# Altium PCB BIT_Level_Shift.PcbDoc
Units mil, origin at the board's own origin, x right, y up, seen from the top; angles counter-clockwise.
Board outline 1435 x 615 mil, 2 copper layers (Top Layer, Bottom Layer); 16 components, 11 nets, 39 pads, 0 vias.
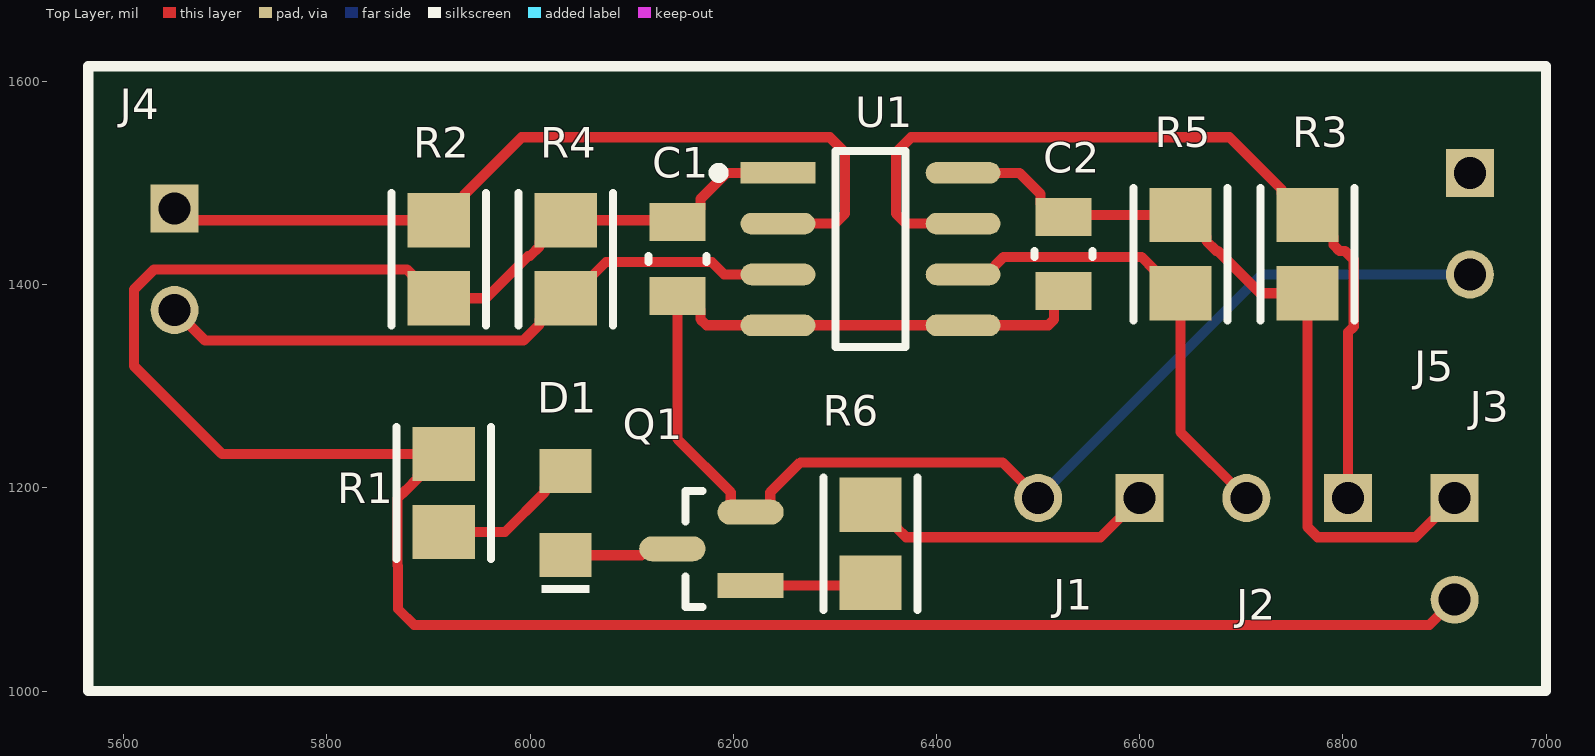
[diagram p0: Top Layer view]
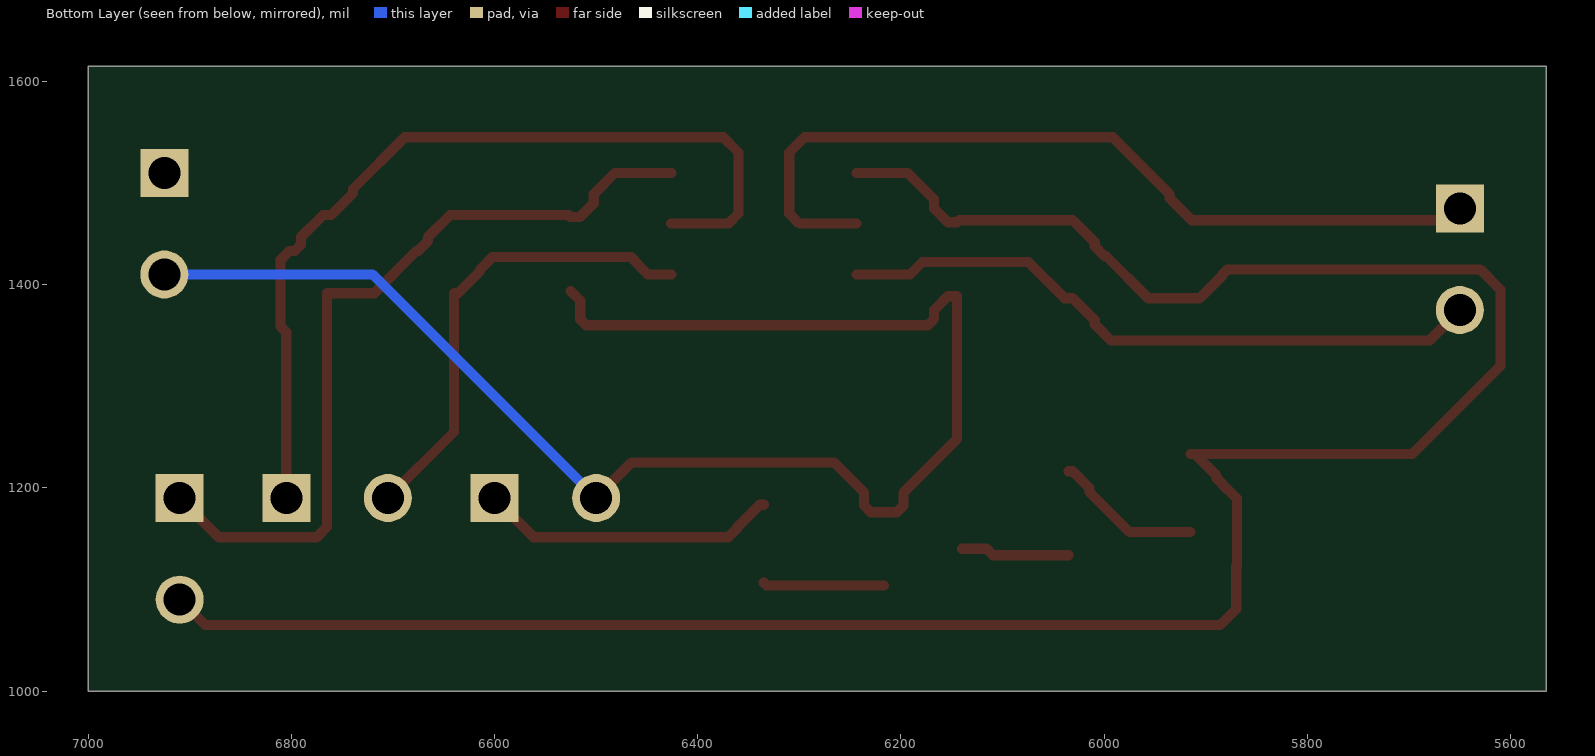
[diagram p1: Bottom Layer view, seen from below]
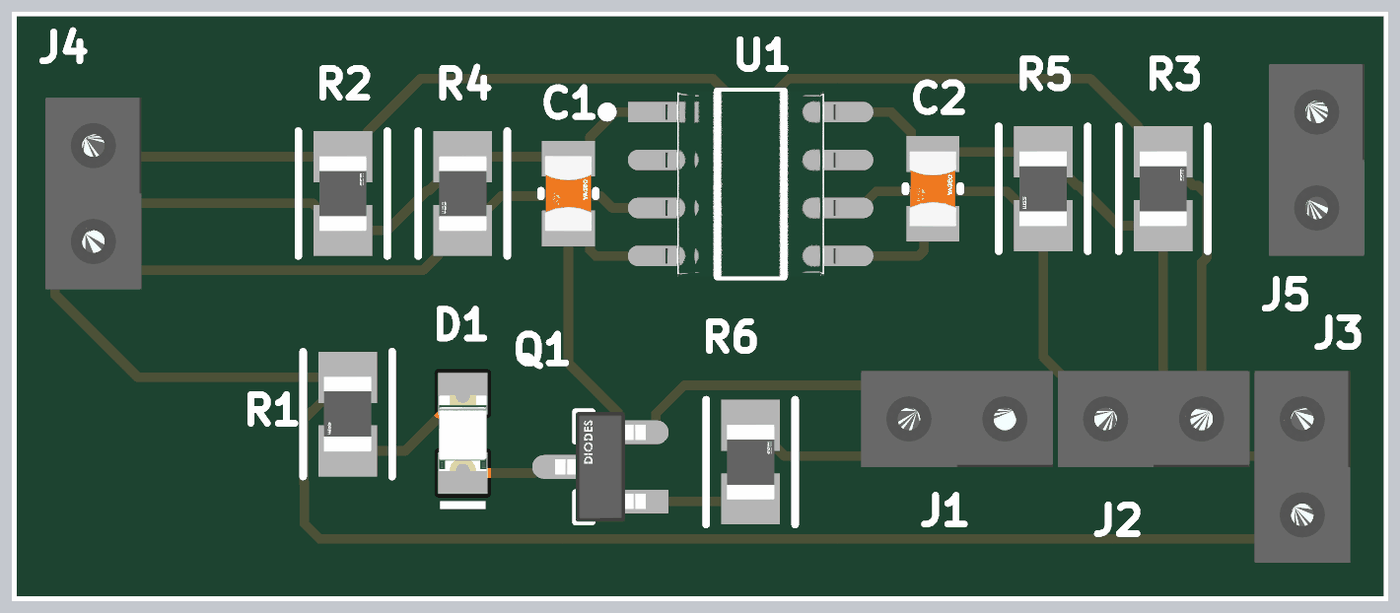
[diagram p2: 3D render of the assembled board from above, using the file's embedded part models]

## Layer stack, top to bottom
Top Solder: solder mask 0.4, Solder Resist, Dk 3.5
Top Layer: signal copper 1.4
Dielectric 1: dielectric 12.6, FR-4, Dk 4.8
Bottom Layer: signal copper 1.4
Bottom Solder: solder mask 0.4, Solder Resist, Dk 3.5

## Board outline
5565,1000 7000,1000 7000,1615 5565,1615

## Design rules (kind name [scope] priority, off if disabled: settings)
Clearance [All] p1: gap=10 ignorepadtopadclearanceinfootprint=FALSE
PolygonConnect [All] p1: connectstyle=Relief reliefconductorwidth=10 reliefentries=4 polygonreliefangle="90 Angle" airgapwidth=10
RoutingVias [All] p1: holewidth=28 width=50 viastyle="Through Hole" minholewidth=28 minwidth=50 maxholewidth=28 maxwidth=50
SilkToSolderMaskClearance [IsPad] p1: minsilkscreentomaskgap=5 clearancetoexposedcopper=TRUE
SolderMaskExpansion [All] p1: expansion=4 istentingtop=FALSE
SupplyNets "Schematic Supply Nets" [InNet('GND')] p1: voltage=0.000
Width [All] p1: maxlimit=10 minlimit=10 preferedwidth=10
29 further rules are at their usual default settings.

## Components (designator, comment, footprint, x,y, rotation, side; value= is the part's Value field where it differs from the comment)
C1 "CC0805KRX7R9BB104" FP-CC0805-0_85-MFG 6145,1425 r90 top value="100 nF"
C2 "CC0805KRX7R9BB104" FP-CC0805-0_85-MFG 6525,1430 r90 top value="100 nF"
D1 "150080RS75000" WL-SMCW_0805_150080xx75000 6035,1175 r90 top
J1 "801-83-002-10-001101" RHDR2W60P0X254_1X2_508X254X700P 6600,1190 r0 top
J2 "801-83-002-10-001101" RHDR2W60P0X254_1X2_508X254X700P 6805,1190 r0 top
J3 "801-83-002-10-001101" RHDR2W60P0X254_1X2_508X254X700P 6910,1190 r90 top
J4 "801-83-002-10-001101" RHDR2W60P0X254_1X2_508X254X700P 5650,1475 r90 top
J5 "801-83-002-10-001101" RHDR2W60P0X254_1X2_508X254X700P 6925,1510 r90 top
Q1 "MMBT3904-7-F" FP-SOT23-IPC_A 6178.45,1140 r180 top
R1 "RR1220P-103-D" FP-RR1220-IPC_A 5915,1195 r270 top
R2 "RR1220P-103-D" FP-RR1220-IPC_A 5910,1425 r90 top
R3 "RR1220P-103-D" FP-RR1220-IPC_A 6765,1430 r90 top
R4 "RR1220P-103-D" FP-RR1220-IPC_A 6035,1425 r270 top
R5 "RR1220P-103-D" FP-RR1220-IPC_A 6640,1430 r270 top
R6 "RR1220P-103-D" FP-RR1220-IPC_A 6335,1145 r90 top
U1 "ISO1640BDR" FP-D0008A-IPC_C 6335,1435 r0 top

## Footprints (in the part's own frame and the unit in brackets; to place one, negate y for a bottom-side part, rotate by r counter-clockwise, add the part's x,y. Pads: shape width x height; smd on the part's side, far side on the other; paste and mask are expansions set on the pad)
FP-CC0805-0_85-MFG [mm]
  rect 0.95x1.4 smd paste+0 mask+0: 1(-0.925,0) 2(0.925,0)
  silkscreen extent -0.08,-0.72 0.08,0.72, body extent -1.6,-1.05 1.6,1.05, height 0.25
FP-D0008A-IPC_C [mil]
  rect 73.59x21.34 smd paste+0 mask+0: 1(-91.09,75)
  rrect100% 73.59x21.34 smd paste+0 mask+0: 2(-91.09,25) 3(-91.09,-25) 4(-91.09,-75) 5(91.09,-75) 6(91.09,-25) 7(91.09,25) 8(91.09,75)
  silkscreen extent -154,-97 35,97, body extent -132,-100 132,100, height 10
FP-RR1220-IPC_A [mil]
  rect 53.34x61.27 smd paste+0 mask+0: 1(-38.41,0) 2(38.41,0)
  silkscreen extent -65,-46 65,46, body extent -85,-50 85,50, height 10
FP-SOT23-IPC_A [mm]
  rect 1.659x0.627 smd paste+0 mask+0: 1(-0.977,0.915)
  rrect100% 1.659x0.627 smd paste+0 mask+0: 2(-0.977,-0.915) 3(0.977,0)
  silkscreen extent 0.23,-1.45 0.65,1.45, body extent -2.31,-1.95 2.31,1.95, height 0.25
RHDR2W60P0X254_1X2_508X254X700P [mm]
  rect 1.2x1.2 hole 0.8: 1(0,0)
  round 1.2 hole 0.8: 2(-2.54,0)
  body extent -3.81,-1.27 1.27,1.27, height 7
WL-SMCW_0805_150080xx75000 [mm] "SMD Mono-color Chip LED, body 2.0x1.25mm"
  rect 1.1x1.3 smd: 1(-1.05,0) 2(1.05,0)
  silkscreen extent -2,-0.6 -1.8,0.6, body extent -1,-0.63 1,0.62, height 0.7

## Part data
C1 C2: library part CMP-2100-03606-3, "CAP CER 0.1UF 50V X7R 0805", Capacitance="100 nF", Manufacturer=Yageo, Package=CC0805-0.85, Temperature="-30°C to +85°C", Temperature Characteristic=X7R, Temperature Range High=+85°C, Temperature Range Low=-30°C, Tolerance=0.1, Voltage Rating="50 V", Automotive=No, Category=Cap, ComponentLink2Description=Datasheet, ComponentLink2URL=http://www.yageo.com/documents/recent/UPY-GPHC_Y5V_6.3V-to-50V_8.pdf, Device Class L1="Passive Components", Device Class L2=Capacitors, Device Class L3="Ceramic Capacitors", Digikey Description="CAP CER 0.1UF 50V X7R 0805", Footprint Url=http://www.yageo.com/exep/pages/download/literatures/UPY-C_GEN_24.pdf, Height=0.95mm, Ipc Land Pattern Name=CAPC200125X85, Lead Free=Yes, Manufacturer Part Number=CC0805KRX7R9BB104, Material=Ceramic, Mouser Description="Multilayer Ceramic Capacitors MLCC - SMD/SMT 100nF 50V X7R 10%", Octopart=https://octopart.com/cc0805krx7r9bb104-yageo-192993, RoHS=TRUE
D1: library part CMP-1426-00011-3, "LED Uni-Color Red 630nm 2-Pin Chip 0805(2012Metric) T/R", Case Code (Imperial)=0805, Case Code (Metric)=2012, Color=Red, Forward Current=100mA, Forward Voltage=2V, Max Junction Temperature (Tj)=95°C, Max Operating Temperature=85°C, Max Reverse Voltage (DC)=5V, Min Operating Temperature=-40°C, Power Dissipation=72mW, Test Current=20mA, Case/Package=0805, Dominant Wavelength=625nm, Height=700µm, Length=2mm, Lens Style="Clear, Rectangular", Luminous Intensity=150mcd, Mount="Surface Mount", Packaging="Tape and Reel", Peak Wavelength=630nm, REACH SVHC=Unknown, RoHS=Compliant, Viewing Angle=140°, Wavelength=625nm, Width=1.25mm
J1 J2 J3 J4 J5: "Connector", Manufacturer_Name=Preci-Dip, Mouser Part Number=437-8018300210001101, Datasheet Link=https://www.precidip.com/AppHost/9696,1/Scripts/Modules/Catalog/Default.aspx?c=7&i=310&p=107&pdf=1&dsku=801-PP-NNN-10-001101, Height=7mm, Manufacturer_Part_Number=801-83-002-10-001101, Mouser Price/Stock=https://www.mouser.co.uk/ProductDetail/Preci-dip/801-83-002-10-001101?qs=FtMuP6KVi2SapQB4HbL8Ng%3D%3D
Q1: library part CMP-2000-04931-2, "TRANS NPN 40V 0.2A SMD SOT23-3", Case/Package=SOT-23, Collector Base Voltage (VCBO)=60V, Collector Emitter Breakdown Voltage=40V, Collector Emitter Saturation Voltage=300mV, Continuous Collector Current=200mA, Emitter Base Voltage (VEBO)=6V, Frequency=300MHz, Max Operating Temperature=150°C, Max Power Dissipation=300mW, Min Operating Temperature=-55°C, Package Quantity=3000, Power Dissipation=350mW, Collector Emitter Voltage (VCEO)=40V, Contact Plating=Tin, Element Configuration=Single, Gain Bandwidth Product=300MHz, Height=1mm, hFE Min=100, Lead Free="Lead Free", Length=3.05mm, Max Breakdown Voltage=40V, Max Collector Current=200mA, Max Frequency=300MHz, Mount="Surface Mount", Number of Elements=1, Number of Pins=3, Packaging="Tape and Reel", Polarity=NPN, Radiation Hardening=No, REACH SVHC="No SVHC", Transition Frequency=300MHz, Voltage Rating (DC)=40V, Weight=0.000282oz, Width=1.4mm
R1 R2 R3 R4 R5 R6: library part CMP-2001-03215-2, "10kΩ ±0.5% 0.1W 1/10W Chip Resistor 0805 (2012 Metric) Thin Film", Case Code (Imperial)=0805, Case Code (Metric)=2012, Max Operating Temperature=125°C, Max Power Dissipation=100mW, Min Operating Temperature=-55°C, Package Quantity=1, Resistance=10kR, Resistance Tolerance=0.5%, Resistor Type="Thin Film", Temperature Coefficient=25ppm/°C, Voltage Rating=100V, Case/Package=0805, Depth=1.25mm, Height=0.4mm, Lead Free="Lead Free", Length=2mm, Number of Terminations=2, Packaging="Tape and Reel", Power Rating=100mW, RoHS Compliant=Yes, Series=RR, Size Code=0805, Technology="THIN FILM", Termination=SMD/SMT, Tolerance=0.5%, Voltage Rating (DC)=100V, Weight=0.000194oz, Width=1.25mm
U1: library part CMP-04872-000071-1, "ROBUST-EMC BIDIRECTIONAL I2C DIG", RoHS Compliant=Yes

## Nets (pads, with @x,y where several pads share a name; then routed paths per layer and width w, separated by ;. In a path a pad name is that pad's centre, name@x,y a point inside that pad or via, vN(x,y) a via of type N, cw(c..) or ccw(c..) an arc to the next point about the centre after c; other vN are vias at no path point)
3.3V: C2.2 J3.1 R3.1 R5.1 U1.8 | length 792.4
  Top Layer w10: U1.8 6481.42,1510 6502.44,1488.98 6502.44,1480.12 6516.14,1466.42 C2.2 6526.99,1468.41 R5.1 6643.96,1468.41 6665.63,1446.74 6665.63,1442.78 6675.15,1433.26 6676.85,1433.26 6718.52,1391.59 R3.1 6765,1161.54 6775.16,1151.38 6871.38,1151.38 J3.1
GND: C1.1 C2.1 J1.2 J5.2 Q1.2 U1.4 U1.5 | length 1513.1
  Top Layer w10: J1.2 6464.92,1225.08 6265.97,1225.08 6236.39,1195.51 6236.39,1182.8 6229.61,1176.02 Q1.2 6204.2,1176.02 6197.42,1182.8 6197.42,1195.51 6145,1247.93 C1.1 6153.86,1388.58 6167.56,1374.88 6167.56,1366.02 6173.58,1360 U1.4 U1.5 6509.88,1360 6515.74,1365.86 6515.74,1384.32 C2.1
  Bottom Layer w10: J1.2 6720,1410 J5.2
Jetson_5V: C1.2 J3.2 R1.1 R2.1 R4.1 U1.1 | length 2357.8
  Top Layer w10: R1.1 R1.1@5911.04,1233.41 ; U1.1 6193.58,1510 6167.56,1483.98 6167.56,1475.12 6153.86,1461.42 C1.2 6143.01,1463.41 R4.1 6031.04,1463.41 6009.37,1441.74 6009.37,1437.78 5999.85,1428.26 5998.15,1428.26 5956.48,1386.59 R2.1 5906.04,1386.59 5884.37,1408.26 5884.37,1409.14 5878.51,1415 5630,1415 5610,1395 5610,1320 5696.59,1233.41 R1.1@5911.04,1233.41 ; J3.2 6884.92,1064.92 5885.86,1064.92 5870,1080.78 5870,1123.07 5869.37,1123.7 5869.37,1189.47 5878.15,1198.26 5878.26,1198.26 5889.37,1209.37 5889.37,1211.74 R1.1@5911.04,1233.41
Jetson_GPIO: J1.1 R6.2 | length 294.8
  Top Layer w10: R6.2 6338.96,1183.41 6360.63,1161.74 6360.63,1160.86 6370.11,1151.38 6561.38,1151.38 J1.1
NetD1_1: D1.1 Q1.3 | length 107.6
  Top Layer w10: D1.1 6109.38,1133.66 6115.72,1140 Q1.3
NetD1_2: D1.2 R1.2 | length 147.1
  Top Layer w10: R1.2 5975.25,1156.59 6014.41,1195.75 6014.41,1199.68 6031.06,1216.34 D1.2
NetQ1_1: Q1.1 R6.1 | length 119.2
  Top Layer w10: Q1.1 6332.39,1103.98 R6.1
SCL_Jetson: J2.2 R5.2 U1.6 | length 465.4
  Top Layer w10: U1.6 6449.14,1410 6457.88,1418.74 6457.88,1419.14 6466.02,1427.28 6601.75,1427.28 6614.37,1414.67 6614.37,1413.26 6636.04,1391.59 R5.2 6640,1255 J2.2
SCL_PCB: J4.2 R4.2 U1.3 | length 645.8
  Top Layer w10: J4.2 5680.08,1344.92 5993.33,1344.92 6009.37,1360.95 6009.37,1364.92 6031.04,1386.59 R4.2 6038.96,1386.59 6074.66,1422.28 6178.77,1422.28 6191.06,1410 U1.3
SDA_Jetson: J2.1 R3.2 U1.7 | length 880.6
  Top Layer w10: U1.7 6370,1460 6360,1470 6360,1530 6375,1545 6688.41,1545 6739.37,1494.05 6739.37,1490.08 6761.04,1468.41 R3.2 6768.96,1468.41 6790.63,1446.74 6790.63,1439.12 6796.49,1433.26 6801.85,1433.26 6810.63,1424.47 6810.63,1358.7 6805,1353.07 J2.1
SDA_PCB: J4.1 R2.2 U1.2 | length 837.4
  Top Layer w10: J4.1 5661.59,1463.41 R2.2 5913.96,1463.41 5935.63,1485.08 5935.63,1489.05 5991.59,1545 6295,1545 6310,1530 6310,1470 6300,1460 U1.2
pads on no net: J5.1

## Silkscreen, mask and mechanical layers (free items; w line width, h text height)
Top Overlay:
  the board outline again, w10